# EAGLE board ControllaBLE-Dual-SNES-v02 (EAGLE 6.6.0)
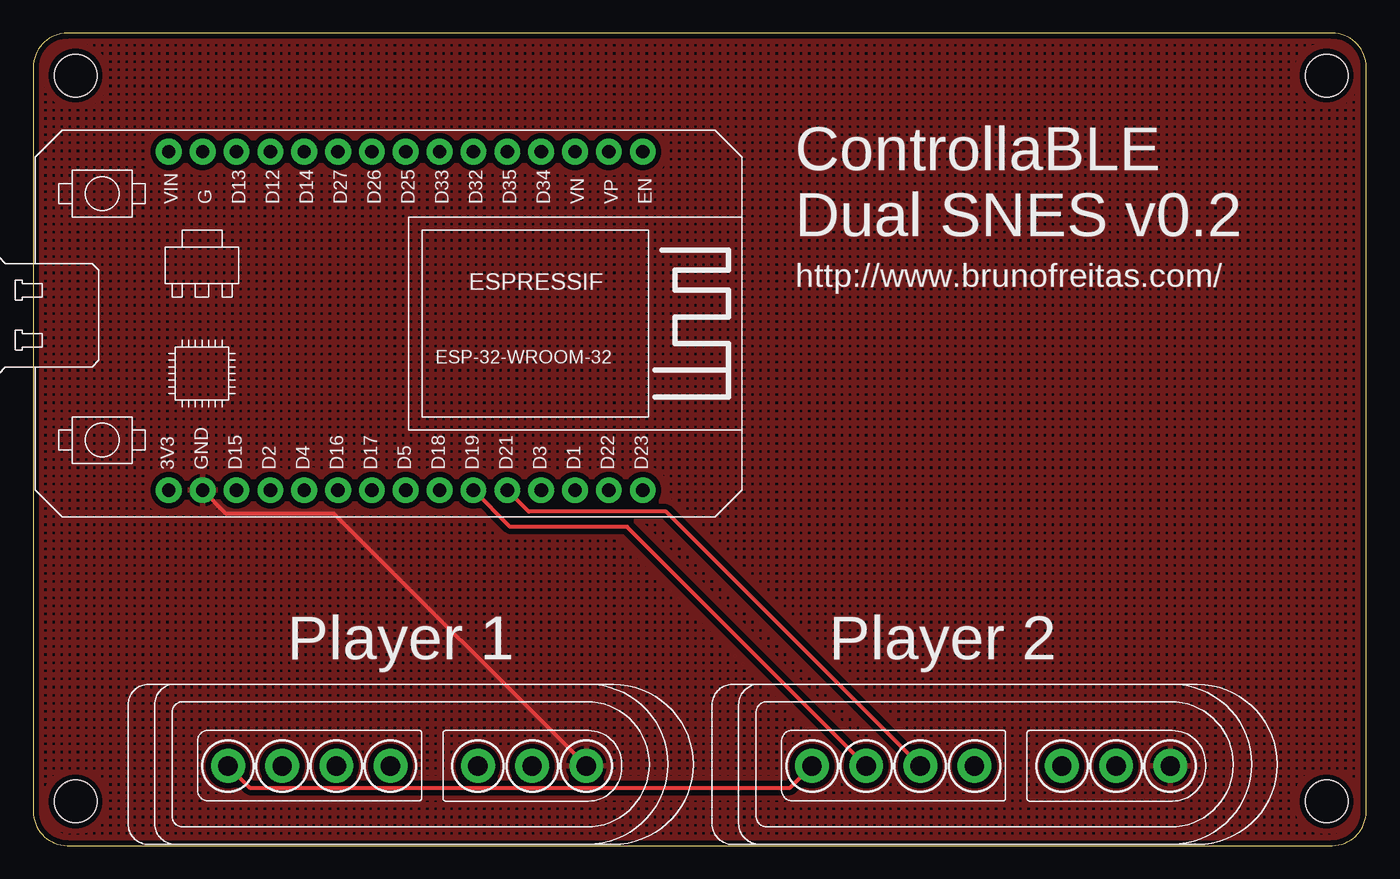
[diagram p0: board, top side]
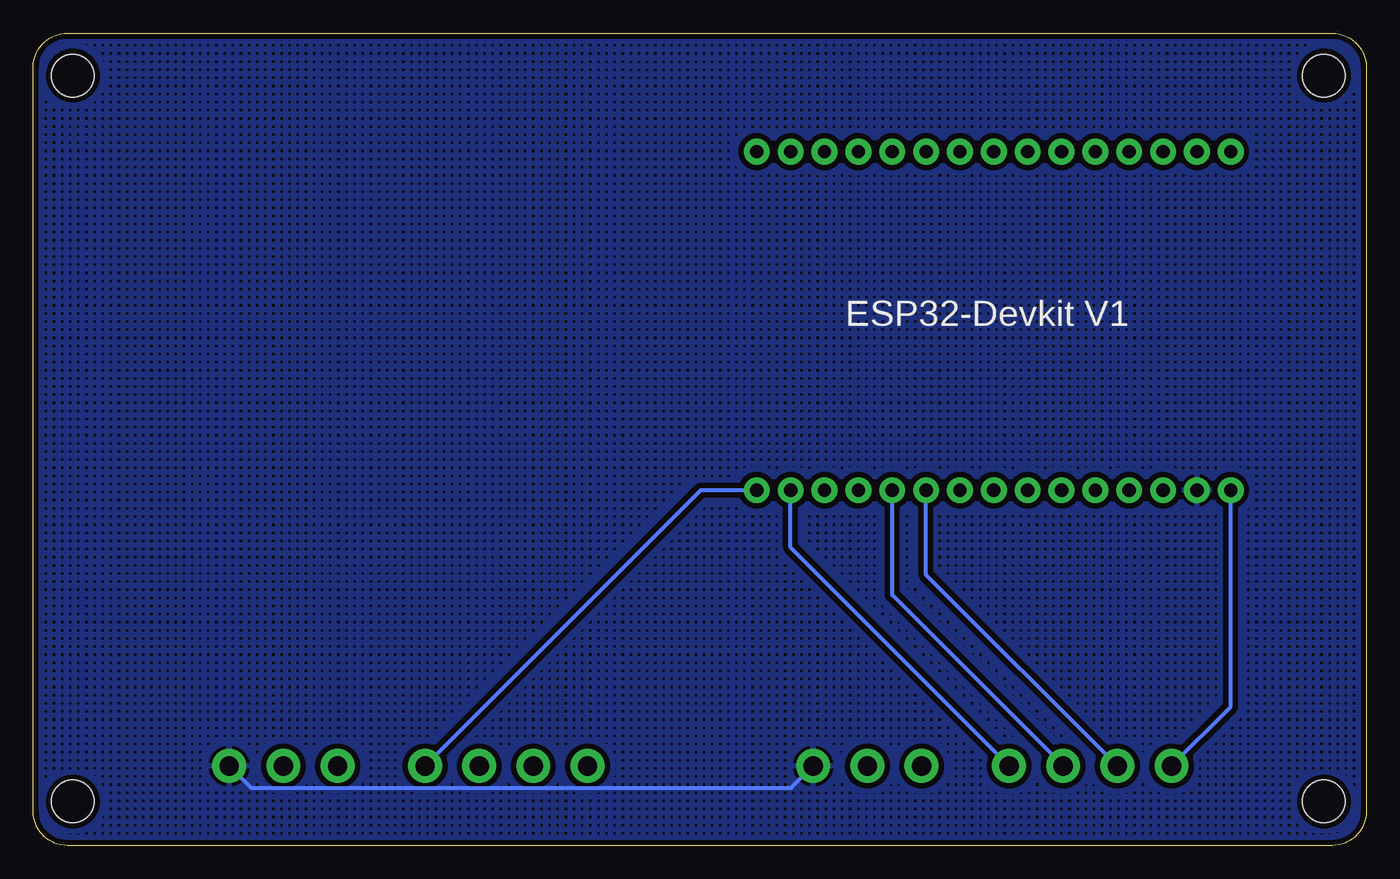
[diagram p1: board, bottom side, seen from below]

Size 100 x 60.95 mm. Coordinates in mm from the lower left corner, seen from the top.
Outline: 0,58.41 0,2.54 arc90 2.54,0 97.46,0 arc90 100,2.54 100,58.41 arc90 97.46,60.95 2.54,60.95 arc90 0,58.41
Copper layers (1*16): Top 0.035mm / dielectric 1.5mm / Bottom 0.035mm
Design rules "SeeedStudio_2layer_DRU_no_angle_20140221": minimum track width 6mil, minimum drill 12mil, track to track 6mil, track to pad 6mil, pad to pad 6mil, via to via 6mil, smd to smd 0mil, copper to edge 10mil, drill to drill 10mil, minimum pad ring 10mil, minimum via ring 6mil, stop-mask expansion 2mil, vias tented up to drill 100mil, thermal gap 10mil
Holes 3.2 mm at 3.17,57.78 3.17,3.3 97.03,57.78 97.03,3.3

## Footprints (pad centres in the part's own frame; a part is rotated, then mirrored left to right if it is on the bottom)
ESP32-DEVKITV1 = drill 1 pad 1.93: 3V3 0,0; D1 30.48,0; D2 7.62,0; D3 27.94,0; D4 10.16,0; D5 17.78,0; D12 7.62,25.4; D13 5.08,25.4; D14 10.16,25.4; D15 5.08,0; D16 12.7,0; D17 15.24,0; D18 20.32,0; D19 22.86,0; D21 25.4,0; D22 33.02,0; D23 35.56,0; D25 17.78,25.4; D26 15.24,25.4; D27 12.7,25.4; D32 22.86,25.4; D33 20.32,25.4; D34 27.94,25.4; D35 25.4,25.4; EN 35.56,25.4; GND 2.54,25.4; GND@1 2.54,0; VIN 0,25.4; VN 30.48,25.4; VP 33.02,25.4
SNESCONN = drill 1.448 pad 2.54: 5V 0,4.064; CLOCK 4.064,4.064; DATA 12.192,4.064; GND 26.884,4.064; LATCH 8.128,4.064; NC 18.756,4.064; NC. 22.82,4.064

## Placement (x,y rotation side)
BOARD1  ESP32DEVKITV1  [ESP32-DEVKITV1]  10.16,26.67 0 top
U$1  SNESCONN  [SNESCONN]  14.61,1.91 0 top
U$2  SNESCONN  [SNESCONN]  58.42,1.91 0 top

## Library data of the parts
BOARD1 = ESP32-DEVKITV1
U$1 U$2 = gamepad-conn

## Nets
3V3: BOARD1.3V3 U$1.5V U$2.5V
CLOCK: BOARD1.D19 U$1.CLOCK U$2.CLOCK
GND: BOARD1.GND@1 U$1.GND U$2.GND
LATCH: BOARD1.D21 U$1.LATCH U$2.LATCH
P1_DATA: BOARD1.D22 U$1.DATA
P2_DATA: BOARD1.D23 U$2.DATA

## Tracks (layer width: path | path; a pad name or v marks a point on that pad's centre or on a via)
3V3
  Top 0.305: U$1.5V 16.24,4.33 56.78,4.33 U$2.5V
  Bottom 0.305: U$1.5V 10.16,10.41 BOARD1.3V3
CLOCK
  Top 0.305: U$2.CLOCK 44.55,23.91 35.78,23.91 BOARD1.D19
  Bottom 0.305: U$1.CLOCK 33.02,20.32 BOARD1.D19
GND
  Top 0.305: U$1.GND 22.56,24.9 14.47,24.9 BOARD1.GND@1
  Bottom 0.305: U$2.GND 83.65,4.31 43.14,4.31 U$1.GND
  pour Bottom (isolate 0.406, hatched): 0,60.96 100.33,60.96 100.33,0 0,0
  pour Top (isolate 0.406, hatched): 0,60.96 100.33,60.96 100.33,0 0,0
LATCH
  Top 0.305: U$2.LATCH 47.46,25.06 37.17,25.06 BOARD1.D21
  Bottom 0.305: U$1.LATCH 35.56,18.8 BOARD1.D21
P1_DATA
  Bottom 0.305: U$1.DATA 43.18,22.35 BOARD1.D22
P2_DATA
  Bottom 0.305: U$2.DATA 49.91,26.67 BOARD1.D23

## Text on the board
tPlace: ControllaBLE / Dual SNES v0.2 | http://www.brunofreitas.com/ | Player 1 | Player 2